# Allegro board ANT_TEST_V10_231020.brd
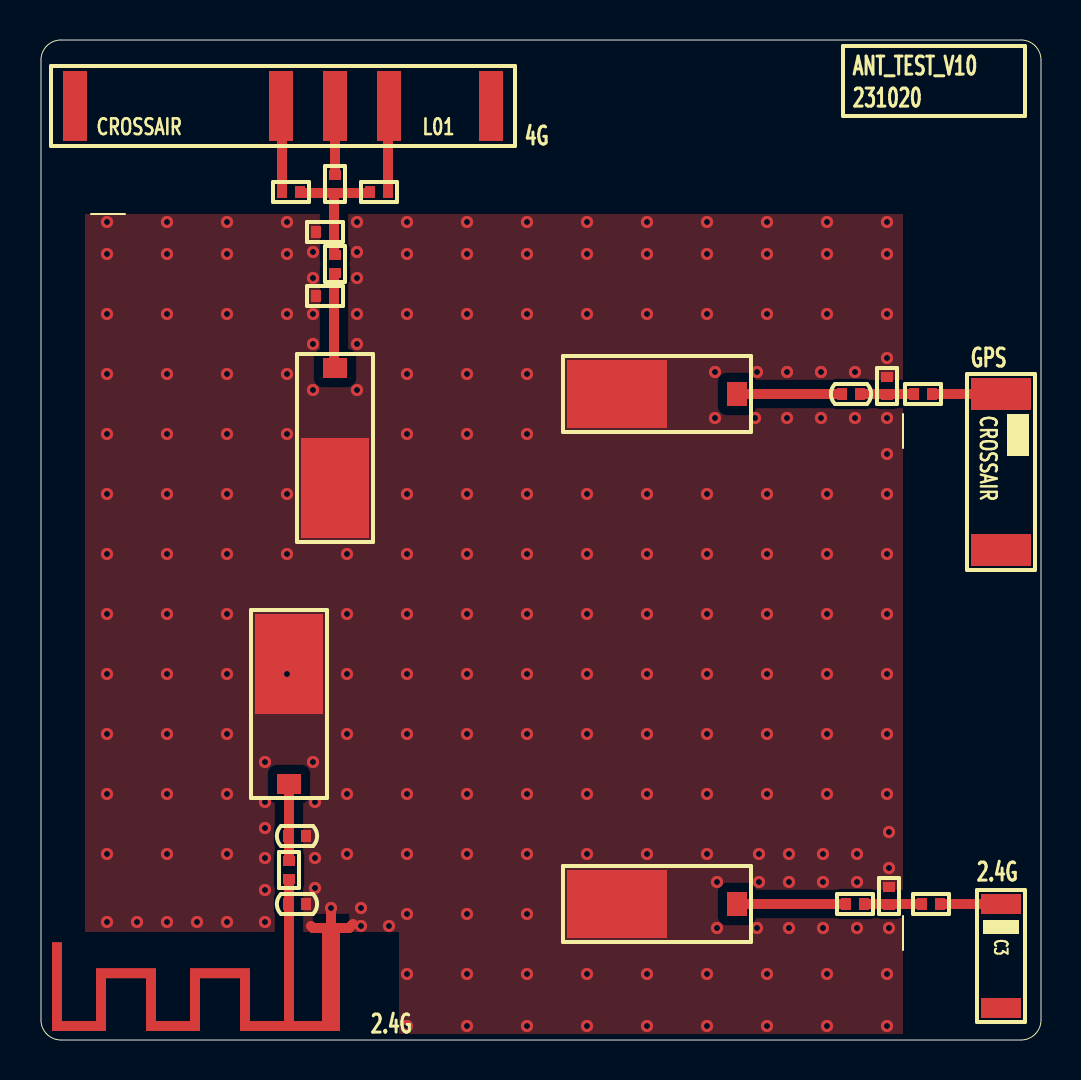
[diagram p0: board, top side]
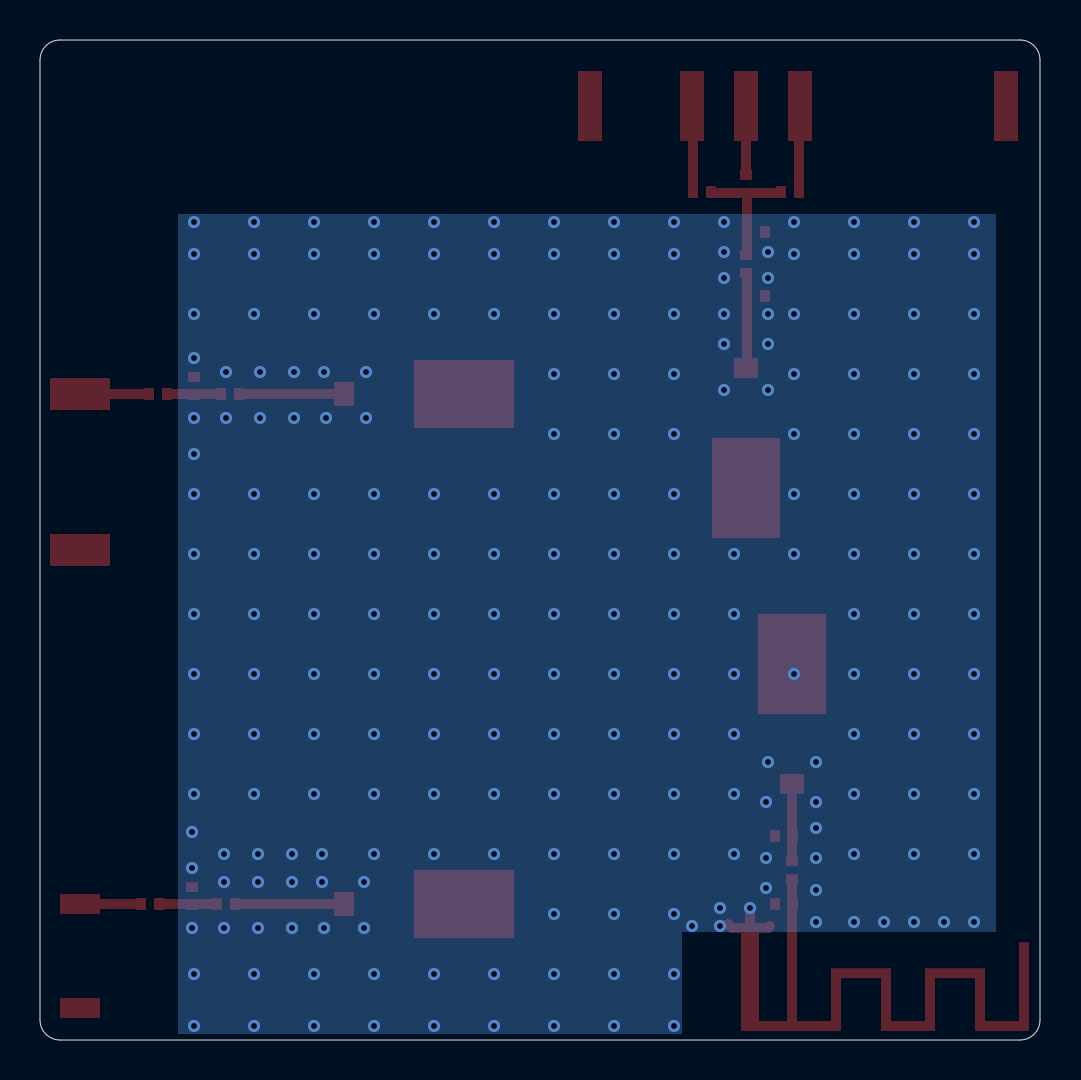
[diagram p1: board, bottom side, seen from below]

Outline 50 x 50 mm; copper layers: TOP, BOTTOM. Coordinates in mm from the lower left corner of the outline.
Outline path: 0,49 arc(0.29,49.71) 1,50 49,50 arc(49.71,49.71) 50,49 50,1 arc(49.71,0.29) 49,0 1,0 arc(0.29,0.29) 0,1 0,49

## Design rules (mm)
constraint set DEFAULT: min track width 0.203, pair gap 0.203

## Placement (name value [footprint] x y rotation side)
C1  100pF_50V  [C0402]  40.5 32.3 0 top
C2  100pF_50V/NI  [C0402]  12.8 10.2 180 top
C3  100pF_50V/NI  [C0402]  12.8 6.8 180 top
L1  18nH  [L0402]  12.5 42.4 180 top
L2  2.2nH  [L0402]  14.7 42.8 90 top
L3  22nH  [L0402]  14.2 40.4 0 top
L4  4.3nH  [L0402]  16.9 42.4 0 top
L5  3nH  [L0402]  42.4 7.2 270 top
L6  6.2nH  [L0402]  44.1 32.3 0 top
L7  6.2nH  [L0402]  42.3 32.7 270 top
NOREF  -  []  0 0 90 top
NOREF#2  -  []  0 0 0 top
R1  0R  [R0402]  14.7 38.8 90 top
R2  0R/NI  [R0402]  14.2 37.2 180 top
R4  0R  [R0402]  40.7 6.8 0 top
R5  0R  [R0402]  44.5 6.8 0 top
R6  0R  [R0402]  12.4 8.5 270 top
U1  -  [CA-L01]  12.1 46.7 0 top
U2  ANT_RG1.13_SMD/NI  [ANT_RG113_SMD]  14.7 33.6 90 top
U3  ANT_RG1.13_SMD/NI  [ANT_RG113_SMD]  34.8 32.3 0 top
U4  -  [CA-G01]  48 28.4 270 top
U5  ANT_RG1.13_SMD/NI  [ANT_RG113_SMD]  34.8 6.8 0 top
U6  -  [CA-C03]  48 4.2 270 top
U7  ANT_RG1.13_SMD/NI  [ANT_RG113_SMD]  12.4 12.8 270 top
U8  ANT_F_2.4G/NI  [ANT_F]  12.4 5.6 180 top

## Library data of the parts
C1-C3 = CAP NP_2
L1-L7 = IND_BEAD_0805_600OHM_1
R1 R2 R4-R6 = R_Generic
U1 = CA-L01
U2 U3 U5 U7 = ANT_RG1.13_SMD
U4 = CA-G01
U6 = CA-C03
U8 = ANT_F_2.4G

## Footprints (pads in the part's own frame, mm; a bottom-side part is the same pattern mirrored in y, then rotated)
ANT_F
  rect 0.9x0.5 smd: 1(-2.1,0)
  rect 0.5x0.5 smd: 2(0,0)
ANT_RG113_SMD
  rect 1x1.2 smd: 1(0,0)
  rect 5x3.4 smd: 2(-6,0)
C0402
  rect 0.5x0.6 smd: 1(-0.45,0) 2(0.45,0)
CA-C03
  rect 1x2 smd: 1(-2.6,0) 2(2.6,0)
CA-G01
  rect 1.6x3 smd: 1(-3.9,0) 2(3.9,0)
CA-L01
  rect 1.2x3.5 smd: 1(-10.4,0) 2(-0.1,0) 3(2.6,0) 4(5.3,0) 5(10.4,0)
L0402
  rect 0.5x0.6 smd: 1(-0.45,0) 2(0.45,0)
R0402
  rect 0.5x0.6 smd: 1(-0.45,0) 2(0.45,0)

## Nets
GND: C2.1 C3.1 L3.1 L5.1 L7.1 R2.2 U2.2 U3.2 U5.2 U7.2 U8.1
N17509871: R1.1 R2.1 U2.1
N17509890: L1.1 L2.1 L3.2(B) L4.1 R1.2
N17510039: L2.2(B) U1.3
N17510042: L1.2(B) U1.2
N17510061: L4.2(B) U1.4
N17510157: C1.2 L6.1 L7.2(B)
N17510266: R4.1 U5.1
N17510272: L5.2(B) R4.2 R5.1
N17510500: C1.1 U3.1
N17510895: R5.2 U6.1
N17511063: L6.2(B) U4.1
N17511344: C2.2 R6.1 U7.1
N17511364: C3.2 R6.2 U8.2

Pads without a net: U1 1 5; U4 2; U6 2

## Via types
v1: diameter 0.61, hole 0.305, TOP to BOTTOM, 224 vias

## Routing (per net, layer and track width the routed paths; a pad name or vN(x,y) marks a point on that pad's centre or on a via; arc(x,y) is an arc through that point)
GND: length 3.1
  TOP w0.5: U8.1 13.6,5.6 13.5,5.7 ; U8.1 14.5,6.5 ; U8.1 15.4,5.6 15.6,5.8
  vias: v1(3.3,40.9) v1(3.3,39.3) v1(3.3,36.3) v1(3.3,33.3) v1(3.3,30.3) v1(3.3,27.3) v1(3.3,24.3) v1(3.3,21.3) v1(3.3,18.3) v1(3.3,15.3) v1(3.3,12.3) v1(3.3,9.3) v1(3.3,5.9) v1(4.8,5.9) v1(6.3,40.9) v1(6.3,39.3) v1(6.3,36.3) v1(6.3,33.3) v1(6.3,30.3) v1(6.3,27.3) v1(6.3,24.3) v1(6.3,21.3) v1(6.3,18.3) v1(6.3,15.3) v1(6.3,12.3) v1(6.3,9.3) v1(6.3,5.9) v1(7.8,5.9) v1(9.3,40.9) v1(9.3,39.3) v1(9.3,36.3) v1(9.3,33.3) v1(9.3,30.3) v1(9.3,27.3) v1(9.3,24.3) v1(9.3,21.3) v1(9.3,18.3) v1(9.3,15.3) v1(9.3,12.3) v1(9.3,9.3) v1(9.3,5.9) v1(11.2,13.9) v1(11.2,11.9) v1(11.2,10.6) v1(11.2,9.1) v1(11.2,7.5) v1(11.2,5.9) v1(12.3,40.9) v1(12.3,39.3) v1(12.3,36.3) v1(12.3,33.3) v1(12.3,30.3) v1(12.3,27.3) v1(12.3,24.3) v1(12.3,18.3) v1(13.6,39.4) v1(13.6,38.1) v1(13.6,36.3) v1(13.6,34.8) v1(13.6,32.5) v1(13.6,13.9) v1(13.7,11.9) v1(13.7,9.1) v1(13.7,7.6) v1(14.5,6.6) v1(15.3,24.3) v1(15.3,21.3) v1(15.3,18.3) v1(15.3,15.3) v1(15.3,12.3) v1(15.3,9.3) v1(15.8,40.9) v1(15.8,39.4) v1(15.8,38.1) v1(15.8,36.3) v1(15.8,34.8) v1(15.8,32.5) v1(16,6.6) v1(16,5.7) v1(17.4,5.7) v1(18.3,40.9) v1(18.3,39.3) v1(18.3,36.3) v1(18.3,33.3) v1(18.3,30.3) v1(18.3,27.3) v1(18.3,24.3) v1(18.3,21.3) v1(18.3,18.3) v1(18.3,15.3) v1(18.3,12.3) v1(18.3,9.3) v1(18.3,6.3) v1(18.3,3.3) v1(18.3,0.7) v1(21.3,40.9) v1(21.3,39.3) v1(21.3,36.3) v1(21.3,33.3) v1(21.3,30.3) v1(21.3,27.3) v1(21.3,24.3) v1(21.3,21.3) v1(21.3,18.3) v1(21.3,15.3) v1(21.3,12.3) v1(21.3,9.3) v1(21.3,6.3) v1(21.3,3.3) v1(21.3,0.7) v1(24.3,40.9) v1(24.3,39.3) v1(24.3,36.3) v1(24.3,33.3) v1(24.3,30.3) v1(24.3,27.3) v1(24.3,24.3) v1(24.3,21.3) v1(24.3,18.3) v1(24.3,15.3) v1(24.3,12.3) v1(24.3,9.3) v1(24.3,6.3) v1(24.3,3.3) v1(24.3,0.7) v1(27.3,40.9) v1(27.3,39.3) v1(27.3,36.3) v1(27.3,27.3) v1(27.3,24.3) v1(27.3,21.3) v1(27.3,18.3) v1(27.3,15.3) v1(27.3,12.3) v1(27.3,9.3) v1(27.3,3.3) v1(27.3,0.7) v1(30.3,40.9) v1(30.3,39.3) v1(30.3,36.3) v1(30.3,27.3) v1(30.3,24.3) v1(30.3,21.3) v1(30.3,18.3) v1(30.3,15.3) v1(30.3,12.3) v1(30.3,9.3) v1(30.3,3.3) v1(30.3,0.7) v1(33.3,40.9) v1(33.3,39.3) v1(33.3,36.3) v1(33.3,27.3) v1(33.3,24.3) v1(33.3,21.3) v1(33.3,18.3) v1(33.3,15.3) v1(33.3,12.3) v1(33.3,9.3) v1(33.3,3.3) v1(33.3,0.7) v1(33.7,33.4) v1(33.7,31.1) v1(33.8,7.9) v1(33.8,5.6) v1(35.7,31.1) v1(35.8,33.4) v1(35.8,5.6) v1(35.9,9.3) v1(35.9,7.9) v1(36.3,40.9) v1(36.3,39.3) v1(36.3,36.3) v1(36.3,27.3) v1(36.3,24.3) v1(36.3,21.3) v1(36.3,18.3) v1(36.3,15.3) v1(36.3,12.3) v1(36.3,3.3) v1(36.3,0.7) v1(37.3,33.4) v1(37.3,31.1) v1(37.4,9.3) v1(37.4,7.9) v1(37.4,5.6) v1(39,33.4) v1(39,31.1) v1(39.1,9.3) v1(39.1,7.9) v1(39.1,5.6) v1(39.3,40.9) v1(39.3,39.3) v1(39.3,36.3) v1(39.3,27.3) v1(39.3,24.3) v1(39.3,21.3) v1(39.3,18.3) v1(39.3,15.3) v1(39.3,12.3) v1(39.3,3.3) v1(39.3,0.7) v1(40.7,33.4) v1(40.7,31.1) v1(40.8,9.3) v1(40.8,7.9) v1(40.8,5.6) v1(42.3,40.9) v1(42.3,39.3) v1(42.3,36.3) v1(42.3,34.1) v1(42.3,31.1) v1(42.3,29.3) v1(42.3,27.3) v1(42.3,24.3) v1(42.3,21.3) v1(42.3,18.3) v1(42.3,15.3) v1(42.3,12.3) v1(42.3,3.3) v1(42.3,0.7) v1(42.4,10.4) v1(42.4,8.6) v1(42.4,5.6)
N17509871: length 4.8
  TOP w0.5: U2.1 14.65,33.65 R2.1 14.65,38.3 R1.1
N17509890: length 6.7
  TOP w0.5: L2.1 16.4,42.35 L4.1 ; L2.1 13,42.35 L1.1 ; L2.1 14.65,42.3 L3.2 14.65,39.3 R1.2
N17510039: length 3.5
  TOP w0.5: L2.2 U1.3
N17510042: length 4.3
  TOP w0.5: L1.2 12.05,46.65 U1.2
N17510061: length 4.3
  TOP w0.5: L4.2 17.35,46.65 U1.4
N17510157: length 2.7
  TOP w0.5: C1.2 42.25,32.3 L7.2 42.35,32.3 L6.1
N17510266: length 5.5
  TOP w0.5: R4.1 U5.1
N17510272: length 2.9
  TOP w0.5: R4.2 42.35,6.8 L5.2 42.45,6.8 R5.1
N17510500: length 5.2
  TOP w0.5: U3.1 C1.1
N17510895: length 3
  TOP w0.5: R5.2 U6.1
N17511063: length 3.5
  TOP w0.5: L6.2 U4.1
N17511344: length 3.9
  TOP w0.5: U7.1 12.4,10.25 C2.2 12.4,10.15 R6.1
N17511364: length 2.5
  TOP w0.5: U8.2 12.4,6.75 C3.2 12.4,6.85 R6.2

## Copper pours and planes (outline as drawn; the poured copper is in the pictures)
GND on TOP, BOTTOM: 2.2,41.3 43.1,41.3 43.1,0.3 17.9,0.3 17.9,5.4 2.2,5.4
N17511364 on TOP (solid shape): 12.65,0.95 14.05,0.95 14.05,5.85 14.95,5.85 14.95,0.45 9.95,0.45 9.95,3.09 7.95,3.09 7.95,0.45 5.25,0.45 5.25,3.09 3.25,3.09 3.25,0.45 0.55,0.45 0.55,4.89 1.05,4.89 1.05,0.95 2.75,0.95 2.75,3.59 5.75,3.59 5.75,0.95 7.45,0.95 7.45,3.59 10.45,3.59 10.45,0.95 12.15,0.95 12.15,5.85 12.65,5.85

## Text on the board
Ref Des/Silkscreen Top: 2.4G | 4G | ANT_TEST_V10 | 231020 | GPS
DIMENSION: FIGURE | FINISHED_SIZE | 0.3048 | DRILL CHART: TOP to BOTTOM | ALL UNITS ARE IN MILLIMETERS | PLATED | QTY | 224 | TOTAL HOLES:
